# Altium PCB PCB1.PcbDoc
Units mm, origin at the board's own origin, x right, y up, seen from the top; angles counter-clockwise.
Board outline 31 x 28.5 mm, 4 copper layers (L1 (Signal), L2 (GND), L3 (GND), L4 (Signal)), stack 1.57 mm thick; 35 components, 27 nets, 170 pads, 96 vias.
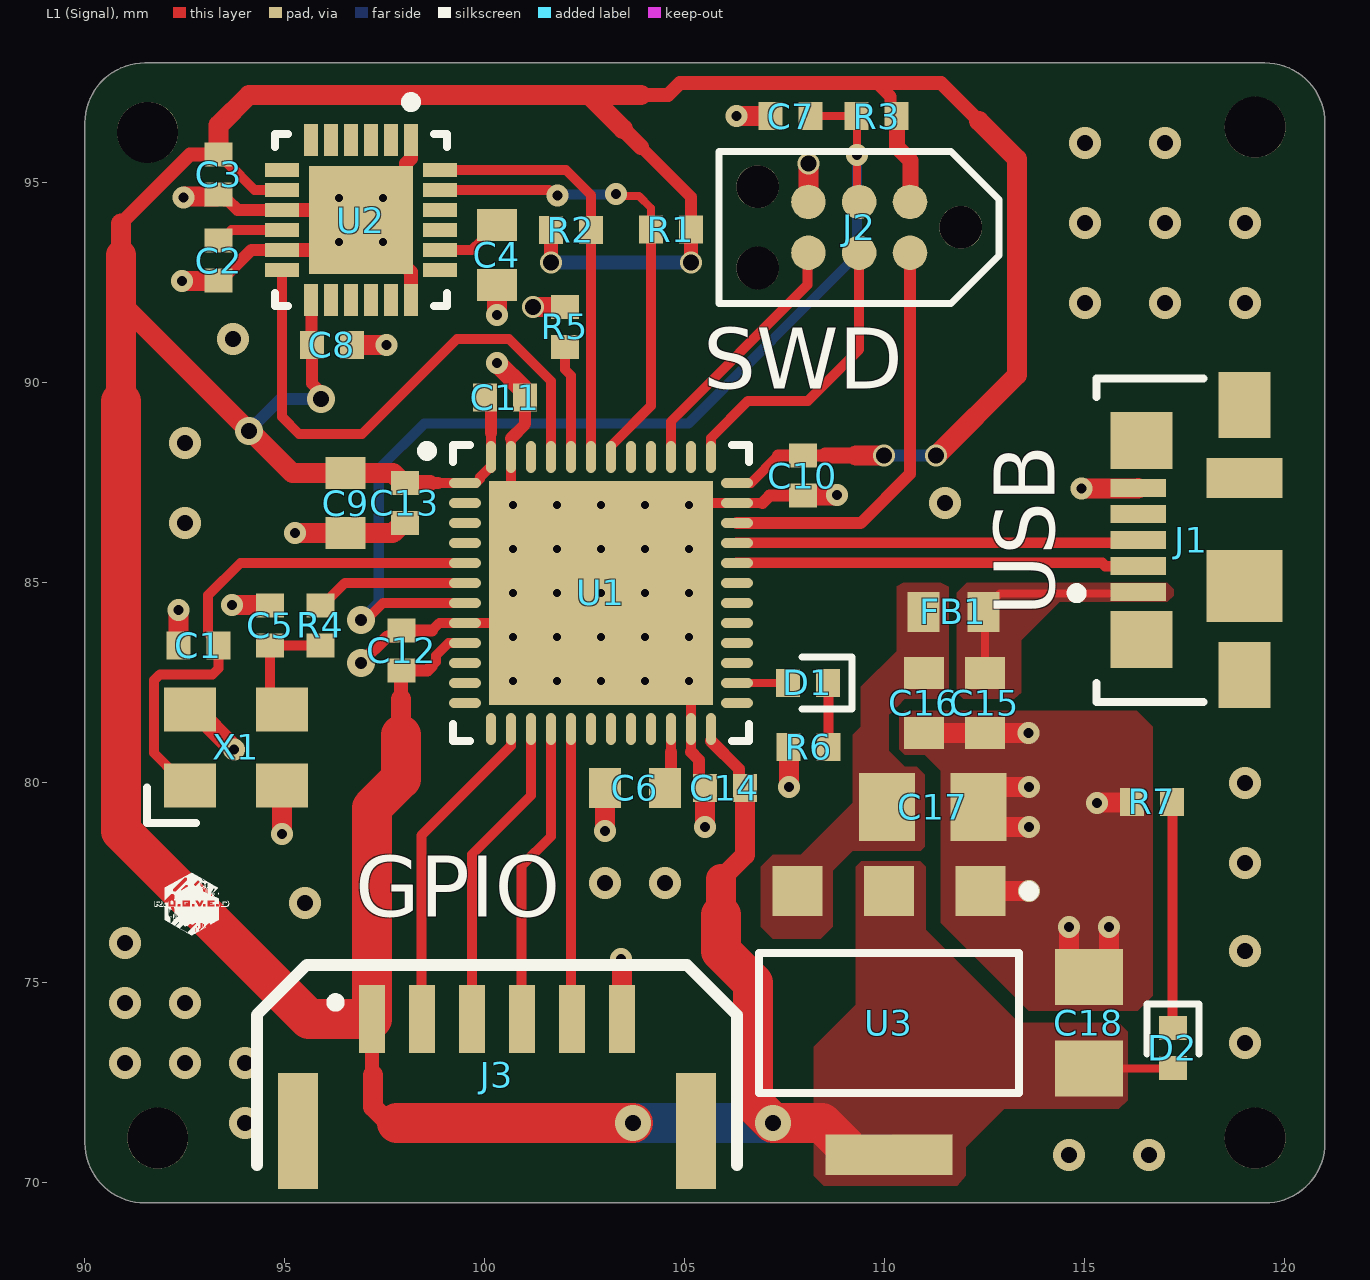
[diagram p0: L1 (Signal) view]
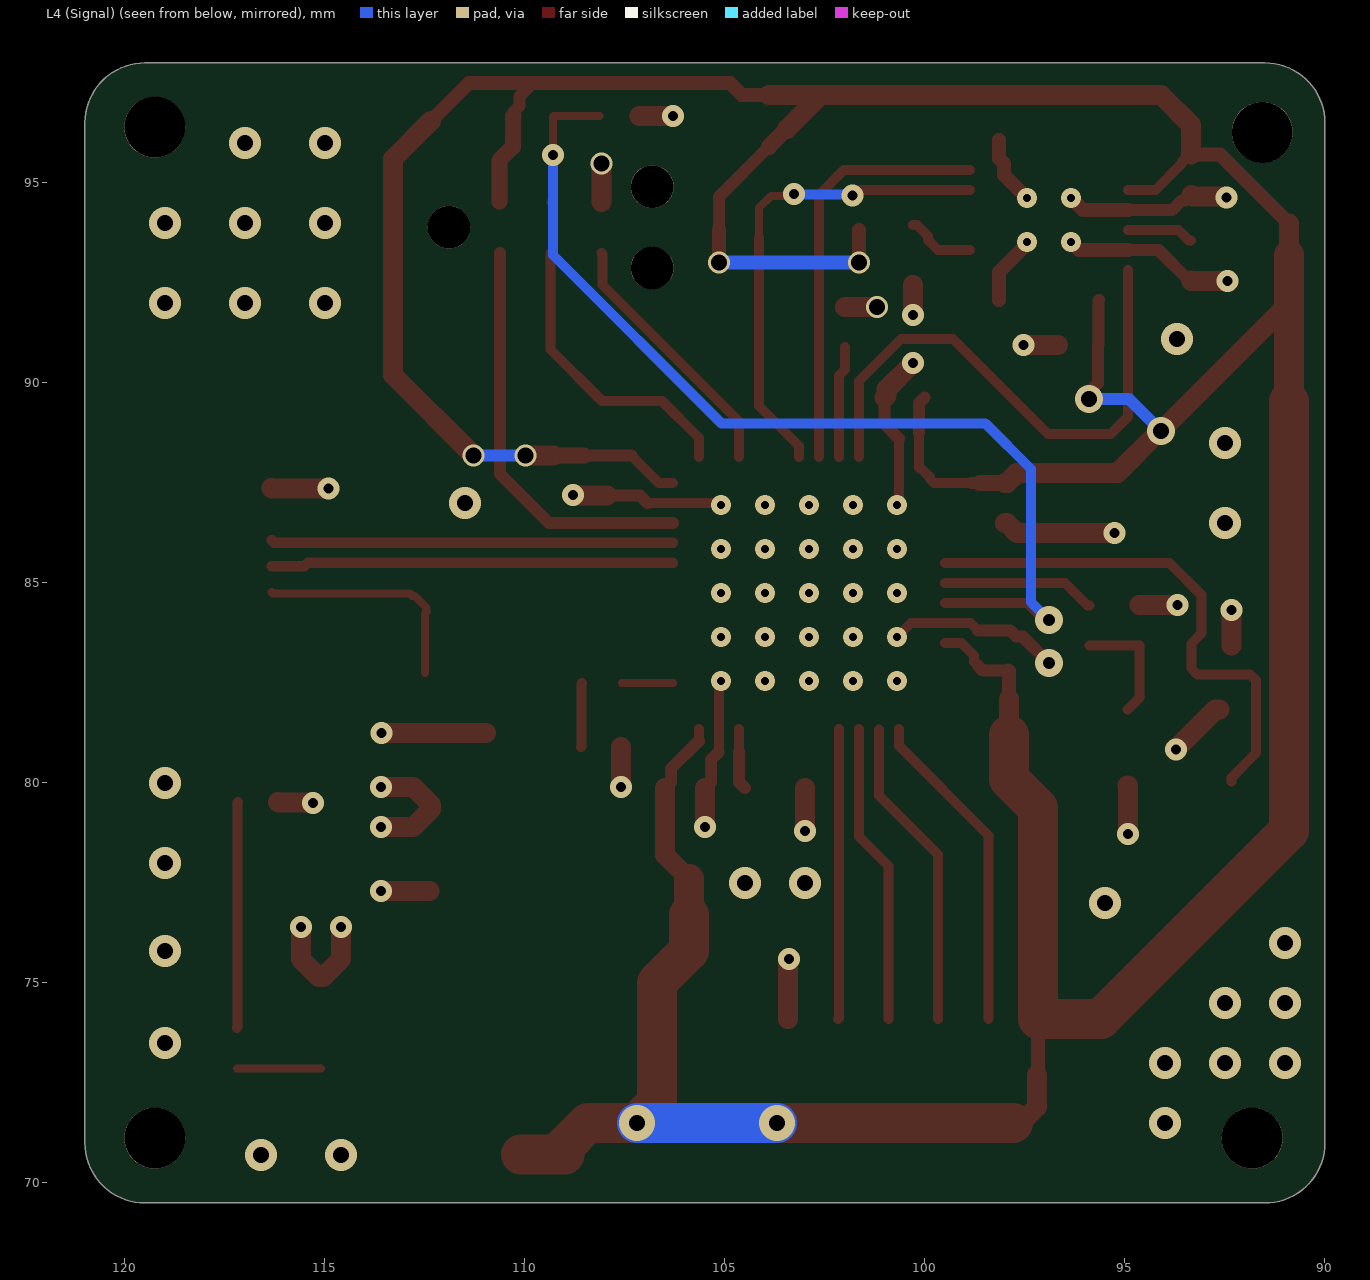
[diagram p1: L4 (Signal) view, seen from below]
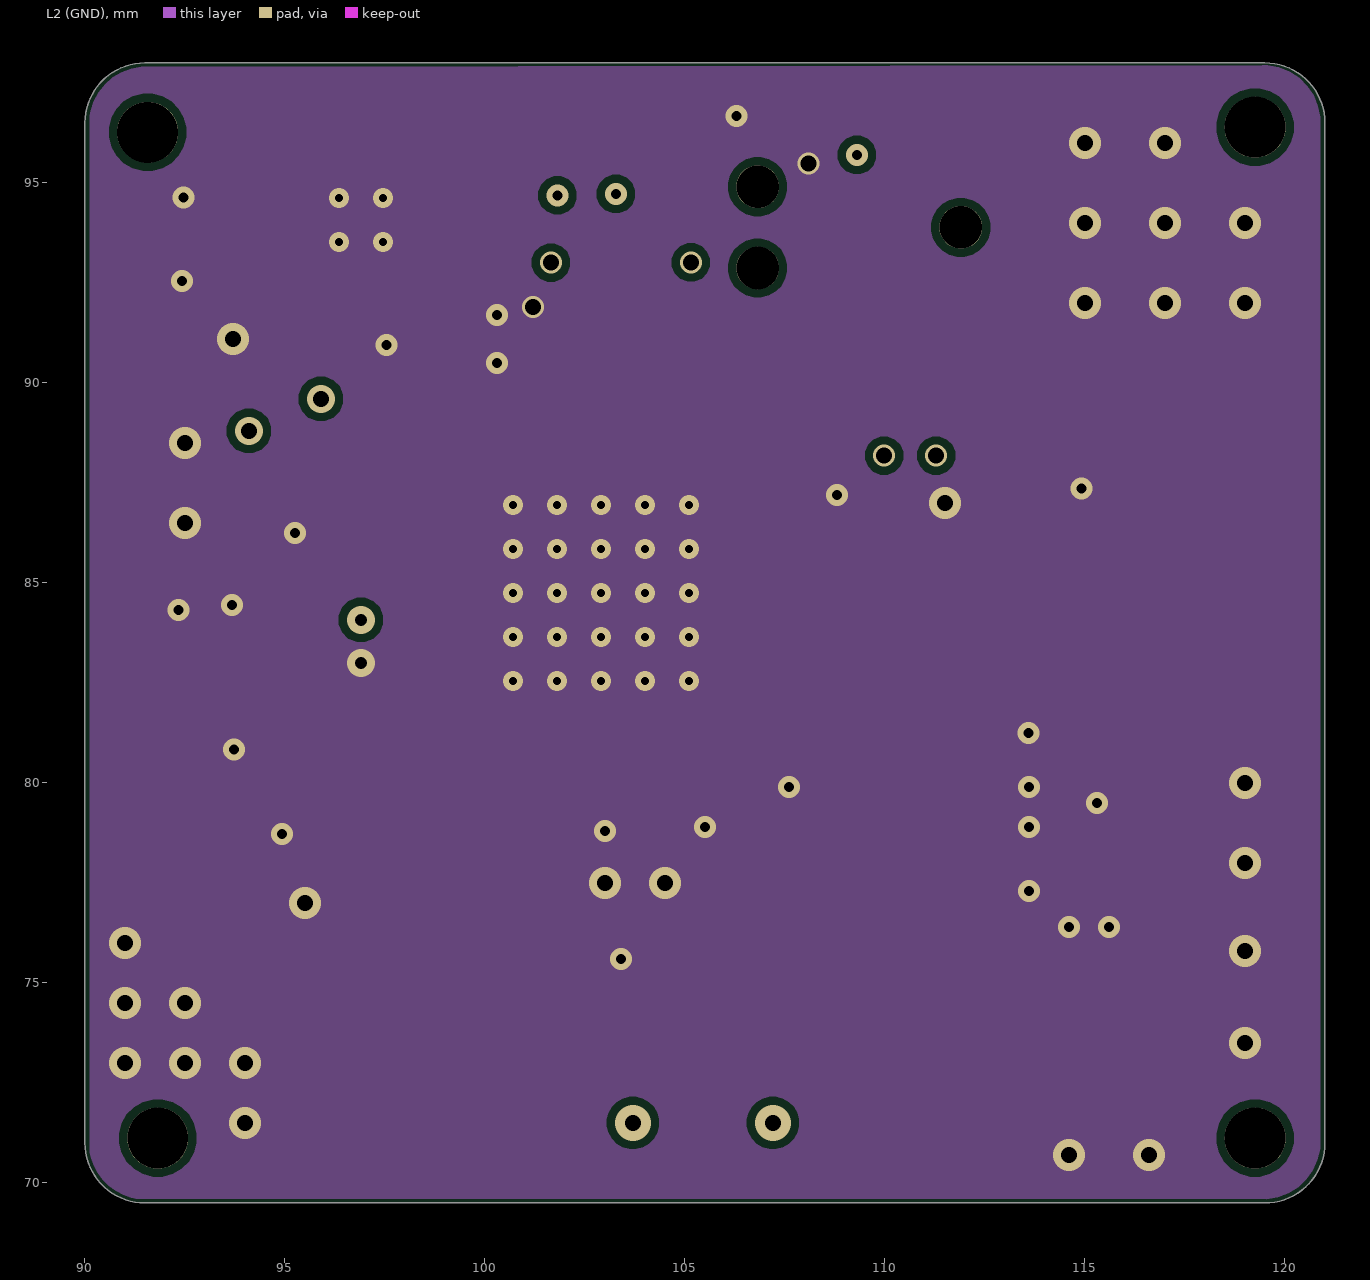
[diagram p2: L2 (GND)]
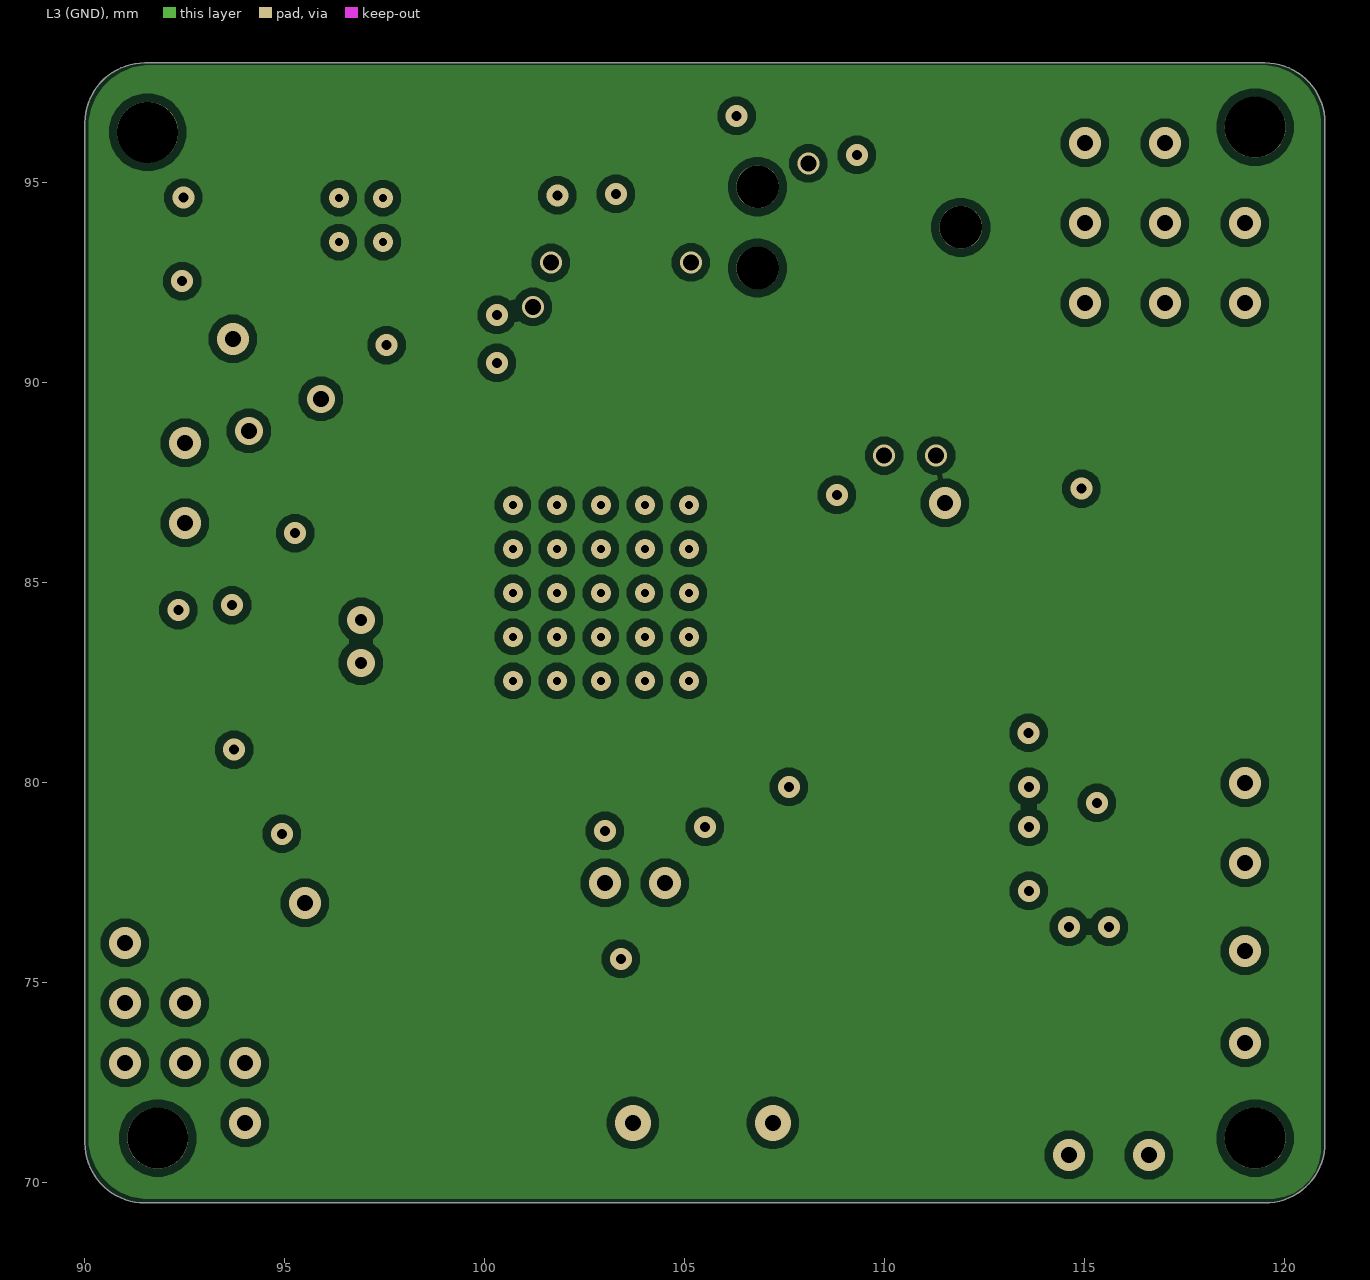
[diagram p3: L3 (GND)]
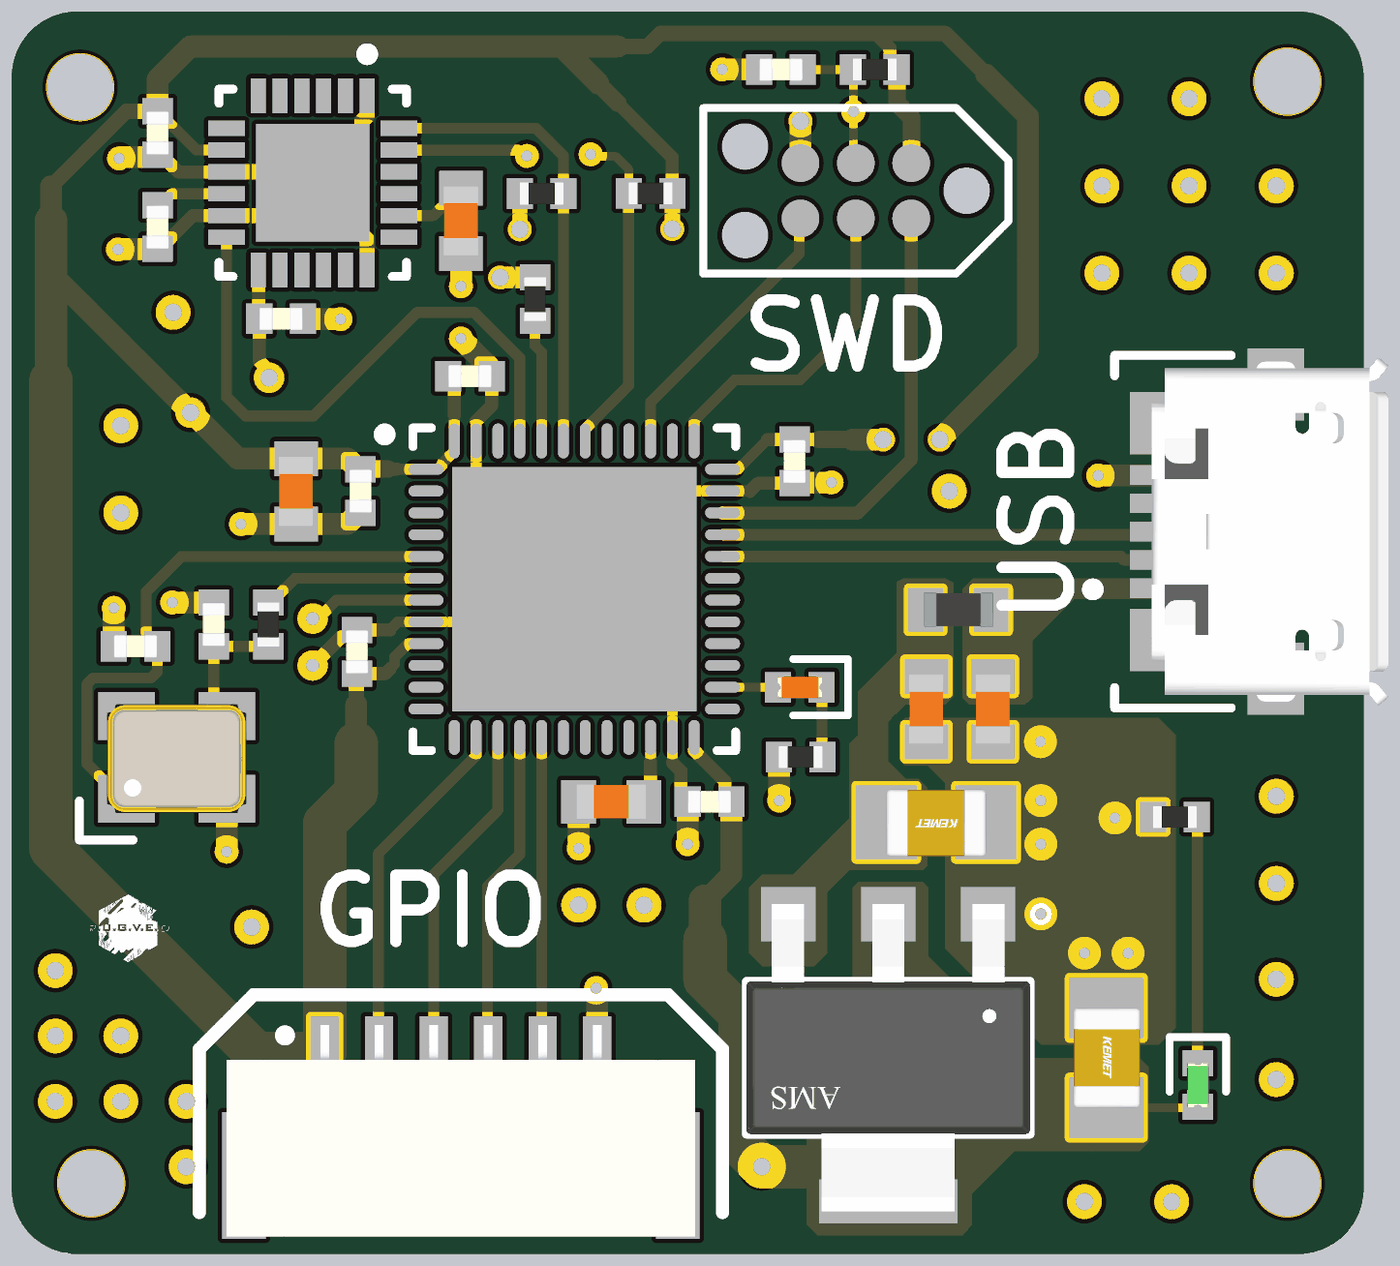
[diagram p4: 3D render of the assembled board from above, using the file's embedded part models]

## Layer stack, top to bottom
Top Solder: solder mask 0.0254, SM-001, Dk 4
L1 (Signal): signal copper 0.035
Dielectric 1: prepreg 0.2, PP-017, Dk 4.6
L2 (GND): signal copper 0.0175
Dielectric 3: core 1.065, Core-039, Dk 4.6
L3 (GND): signal copper 0.0175
Dielectric 5: prepreg 0.2, PP-017, Dk 4.6
L4 (Signal): signal copper 0.035
Bottom Solder: solder mask 0.0254, SM-001, Dk 4

## Board outline
90,71 90,96.5 cw(c91.5,96.5) 91.5,98 119.5,98 cw(c119.5,96.5) 121,96.5 121,71 cw(c119.5,71) 119.5,69.5 91.5,69.5 cw(c91.5,71)

## Design rules (kind name [scope] priority, off if disabled: settings)
Clearance [All] p1: gap=0.2 ignorepadtopadclearanceinfootprint=FALSE except(0: Arc-Fill Arc-Poly Arc-Region Track-Fill Track-Poly Track-Region SMDPad-Fill SMDPad-Poly SMDPad-Region; 0.1: Arc-SMDPad Track-SMDPad SMDPad-SMDPad SMDPad-Via)
DiffPairsRouting [All] p1: maxlimit=0.254 minlimit=0.2 mostfreqgap=0.254 toplayer_maxgap=0.2 toplayer_prefgap=0.2 toplayer_minwidth=0.26 toplayer_maxwidth=0.26 toplayer_prefwidth=0.26 bottomlayer_maxgap=0.2 bottomlayer_prefgap=0.2 bottomlayer_minwidth=0.26 bottomlayer_maxwidth=0.26 bottomlayer_prefwidth=0.26 impedanceprofiledriven=TRUE impedanceprofileid={8F9497E6-6628-411C-8D38-5AE8A2ED5B7B} impedanceprofilevalue=90.000000 maxuncoupledlength=12.7
PolygonConnect [All] p1: connectstyle=Direct reliefconductorwidth=0.254 reliefentries=4 polygonreliefangle="90 Angle" airgapwidth=0.254
RoutingVias [All] p1: holewidth=0.3 width=0.7 viastyle="Through Hole" minholewidth=0.25 minwidth=0.55 maxholewidth=0.4 maxwidth=0.9
SolderMaskExpansion [All] p1: expansion=0.102 istentingtop=FALSE
UnRoutedNet [All] p1: checkbadconnections=TRUE
Width [All] p1: maxlimit=1 minlimit=0.2 preferedwidth=0.3 midlayer1_minwidth=0.254 midlayer1_maxwidth=0.254 midlayer1_prefwidth=0.254 midlayer2_minwidth=0.254 midlayer2_maxwidth=0.254 midlayer2_prefwidth=0.254 bottomlayer_minwidth=0.254 minimp=50.000000 maximp=50.000000 favimp=50.000000
28 further rules are at their usual default settings.

## Classes and differential pairs
differential pair class DIFF_USB: USB_D
differential pair USB_D: +USB_D_P -USB_D_N

## Components (designator, comment, footprint, x,y, rotation, side; value= is the part's Value field where it differs from the comment)
C1 "10p" CAP_0402 92.837,83.439 r180 top
C2 "100n" CAP_0402 93.345,93.056 r90 top
C3 "10n" CAP_0402 93.345,95.215 r90 top
C4 "2u2" CAP_0603 100.3,93.2 r90 top
C5 "10p" CAP_0402 94.631,83.939 r90 top
C6 "2u2" CAP_0603 103.75,79.873 r0 top
C7 "100n" CAP_0402 107.64,96.668 r0 top
C8 "100n" CAP_0402 96.175,90.95 r0 top
C9 "2u2" CAP_0603 96.52,86.995 r90 top
C10 "100n" CAP_0402 107.95,87.681 r90 top
C11 "100n" CAP_0402 100.508,89.637 r180 top
C12 "100n" CAP_0402 97.917,83.312 r270 top
C13 "100n" CAP_0402 98,87 r90 top
C14 "100n" CAP_0402 106,79.873 r0 top
C15 "2u2" CAP_0603 112.5,82 r90 top
C16 "2u2" CAP_0603 110.975,82 r90 top
C17 "22u" CAP_0805 111.2,79.4 r180 top
C18 "22u" CAP_0805 115.1,74 r270 top
D1 "RED" LED_0402_RED 108.075,82.5 r0 top
D2 "GREEN" LED_0402_GREEN 117.2,73.375 r90 top
FB1 "120R" FB_0603 111.709,84.277 r180 top
J1 "473460001" FP-473460001-MFG 118.642,86.07 r90 top
J2 "TC2030-NL" TC2030-NL-FP 109.357,93.889 r180 top
J3 "SM06B-GHS-TB" SM06B-GHS-TB 100.3,72.7 r0 top
R1 "2k2" RES_0402 104.648,93.83 r0 top
R2 "2k2" RES_0402 102.15,93.825 r180 top
R3 "10k" RES_0402 109.79,96.668 r0 top
R4 "0R" RES_0402 95.885,83.939 r90 top
R5 "10k" RES_0402 102,91.4 r270 top
R6 "1k" RES_0402 108.092,80.899 r0 top
R7 "1k" RES_0402 116.675,79.525 r0 top
U1 "STM32F411CEU6" STM-UFQFPN48_L 102.9,84.75 r0 top
U2 "MPU-6050" IS-QFN-24_V 96.901,94.072 r270 top
U3 "AMS1117-3.3" FP-AMS1117-IPC_C 110.1,74 r270 top
X1 "24MHz" XTAL_3225 93.781,80.889 r0 top

## Footprints (in the part's own frame and the unit in brackets; to place one, negate y for a bottom-side part, rotate by r counter-clockwise, add the part's x,y. Pads: shape width x height; smd on the part's side, far side on the other; paste and mask are expansions set on the pad)
CAP_0402 [mm]
  rect 0.6x0.7 smd: 1(-0.5,0) 2(0.5,0)
  body extent -0.5,-0.26 0.5,0.26, height 0.37
CAP_0603 [mm]
  rect 0.8x1 smd: 1(-0.75,0) 2(0.75,0)
  body extent -0.8,-0.4 0.8,0.4, height 0.51
CAP_0805 [mm]
  rect 1.4x1.7 smd: 1(-1.143,0) 2(1.143,0)
  body extent -1.15,-0.76 1.15,0.79, height 1.01
FB_0603 [mm]
  rect 0.8x1 smd: 1(-0.75,0) 2(0.75,0)
  body extent -0.8,-0.4 0.8,0.4, height 0.81
FP-473460001-MFG [mm]
  rect 0.45x1.38 smd paste+0 mask+0: 1(-1.3,2.31) 2(-0.65,2.31) 3(0,2.31) 4(0.65,2.31) 5(1.3,2.31)
  rect 1.425x1.55 smd paste+0 mask+0: 6(-2.488,2.225) 7(2.488,2.225)
  rect 1.65x1.3 smd paste+0 mask+0: 8(-3.375,-0.35) 11(3.375,-0.35)
  rect 1.8x1.9 smd paste+0 mask+0: 9(-1.15,-0.35)
  rect 1x1.9 smd paste+0 mask+0: 10(1.55,-0.35)
  silkscreen extent -4.05,0.67 4.05,3.97, body extent -4.3,-2.48 4.3,3.45, height 0.25
FP-AMS1117-IPC_C [mm]
  rect 1.25x1.25 smd paste+0 mask+0: 1(-3.295,2.29) 2(-3.295,0) 3(-3.295,-2.29)
  rect 1.004x3.182 smd paste+0 mask+0: 4(3.295,0)
  silkscreen extent -3.42,-3.25 1.75,3.63, body extent -3.9,-3.35 3.9,3.35, height 0.25
IS-QFN-24_V [mm] "QFN, 24-Leads, Body 4x4mm, Pitch 0.5mm, Thermal Pad 2.7x2.6mm"
  rect 0.8x0.35 smd: 1(-2,1.25) 2(-2,0.75) 3(-2,0.25) 4(-2,-0.25) 5(-2,-0.75) 6(-2,-1.25) 13(2,-1.25) 14(2,-0.75) 15(2,-0.25) 16(2,0.25) 17(2,0.75) 18(2,1.25)
  rect 0.35x0.85 smd mask+0.102: 7(-1.25,-1.975) 8(-0.75,-1.975) 9(-0.25,-1.975) 10(0.25,-1.975) 11(0.75,-1.975) 19(1.25,1.975) 20(0.75,1.975) 21(0.25,1.975) 22(-0.25,1.975) 23(-0.75,1.975) 24(-1.25,1.975)
  rect 0.35x0.85 smd paste+0: 12(1.25,-1.975)
  rect 2.7x2.6 smd: 25(0,0)
  silkscreen extent -3.07,-2.15 2.15,2.15, body extent -2,-2 2,2, height 0.95
LED_0402_GREEN [mm]
  rect 0.6x0.7 smd: A(-0.5,0) K(0.5,0)
  silkscreen extent -0.15,-0.65 1.1,0.65, body extent -0.51,-0.25 0.51,0.25, height 0.45
LED_0402_RED [mm]
  rect 0.6x0.7 smd: A(-0.5,0) K(0.5,0)
  silkscreen extent -0.15,-0.65 1.1,0.65, body extent -0.51,-0.25 0.51,0.25, height 0.45
RES_0402 [mm]
  rect 0.6x0.7 smd: 1(-0.5,0) 2(0.5,0)
  body extent -0.5,-0.25 0.5,0.25, height 0.3
SM06B-GHS-TB [mm]
  rect 0.65x1.7 smd: 1(-3.125,1.4) 2(-1.875,1.4) 3(-0.625,1.4) 4(0.625,1.4) 5(1.875,1.4) 6(3.125,1.4)
  rect 1x2.9 smd: ""(-4.975,-1.4) ""(4.975,-1.4)
  silkscreen extent -6,-2.25 6,2.75, body extent -5.38,-2.8 5.38,2.05, height 4.26
STM-UFQFPN48_L [mm] "QFN, 48-Leads, Body 7.1x7.1mm, Pitch 0.5mm, Thermal Pad 5.6x5.6mm, IPC High Density"
  oval 0.8x0.25 smd: 1(-3.4,2.75) 2(-3.4,2.25) 3(-3.4,1.75) 4(-3.4,1.25) 5(-3.4,0.75) 6(-3.4,0.25) 7(-3.4,-0.25) 8(-3.4,-0.75) 9(-3.4,-1.25) 10(-3.4,-1.75) 11(-3.4,-2.25) 12(-3.4,-2.75) 25(3.4,-2.75) 26(3.4,-2.25) 27(3.4,-1.75) 28(3.4,-1.25) 29(3.4,-0.75) 30(3.4,-0.25) 31(3.4,0.25) 32(3.4,0.75) 33(3.4,1.25) 34(3.4,1.75) 35(3.4,2.25) 36(3.4,2.75)
  oval 0.25x0.8 smd: 13(-2.75,-3.4) 14(-2.25,-3.4) 15(-1.75,-3.4) 16(-1.25,-3.4) 17(-0.75,-3.4) 18(-0.25,-3.4) 19(0.25,-3.4) 20(0.75,-3.4) 21(1.25,-3.4) 22(1.75,-3.4) 23(2.25,-3.4) 24(2.75,-3.4) 37(2.75,3.4) 38(2.25,3.4) 39(1.75,3.4) 40(1.25,3.4) 41(0.75,3.4) 42(0.25,3.4) 43(-0.25,3.4) 44(-0.75,3.4) 45(-1.25,3.4) 46(-1.75,3.4) 47(-2.25,3.4) 48(-2.75,3.4)
  rect 5.6x5.6 smd: 49(0,0)
  silkscreen extent -4.47,-3.7 3.7,3.7, body extent -3.55,-3.55 3.55,3.55, height 0.6
TC2030-NL-FP [mil]
  round 33.98 smd: 1(-50,-25) 2(-50,25) 3(0,-25) 4(0,25) 5(50,-25) 6(50,25)
  round 42.01 hole 42.01 unplated: MH(-100,0) MH(100,-40) MH(100,40)
  silkscreen extent -138,-75 138,75
XTAL_3225 [mm]
  rect 1.3x1.1 smd: 1(-1.15,-0.95) 2(1.15,-0.95) 3(1.15,0.95) (-1.15,0.95)
  silkscreen extent -2.23,-1.89 -1,-1, body extent -1.6,-1.28 1.6,1.22, height 0.61

## Part data
C1 C2 C3 C5 C7 C8 C10 C11 C12 C13 C14: library part CAP_0402_16V, "Capacitor SMD 0402 16V"
C4 C6 C9 C15 C16: library part CAP_0603_16V, "Capacitor SMD 0603 16V"
C17 C18: library part CAP_0805_16V, "Capacitor SMD 0805 16V"
D1: library part LED_0402_RED, "LED 0402 RED SMD"
D2: library part LED_0402_GREEN, "LED 0402 GREEN SMD"
FB1: library part FB_0603, "Ferrite Bead SMD 0603"
J1: library part CMP-2000-05246-2, "CONN RCPT USB2.0 MICRO B SMD R/A", Current Rating=1.8A, Manufacturer=Molex, Package=0, Temperature="-30°C to +85°C", Temperature Range High=+85°C, Temperature Range Low=-30°C, Voltage Rating=30V, Automotive=No, Category=Conn, ComponentLink2Description=Datasheet, ComponentLink2URL=https://www.molex.com/webdocs/datasheets/pdf/en-us/0473460001_IO_CONNECTORS.pdf, Conn Orientation="Right Angle", Contact Material=Gold,Nickel, Device Class L1=Connectors, Device Class L2="USB Connectors", Device Class L3=unset, Digikey Description="CONN RCPT USB2.0 MICRO B SMD R/A", Footprint Url=https://www.molex.com/pdm_docs/sd/473460001_sd.pdf, Height=2.945mm, Is Female=yes, Lead Free=Yes, Manufacturer Part Number=473460001, Number Of Contacts=5, Octopart=https://octopart.com/47346-0001-molex-7164928, Pitch=0.65mm, RoHS=TRUE, Shielding=true, Usb Standard="USB 2.0"
J2: "Tag-Connect No-Solder SWD Debug Connector (No Legs) DO NOT PLACE", Manufacturer=Tag-Connect, Manufacturer Part Number=TC2030-NL-FP
J3: "Header Connector 6 Position 1.25MM Pitch SMD Horizontal JST GH", Manufacturer=JST, Manufacturer Part Number=SM06B-GHS-TB
R1 R2 R3 R4 R5 R6 R7: library part RES_0402, "Resistor SMD 0402"
U1: library part CMP-0243-00165-1, "ARM Cortex-M4 32-bit MCU+FPU, 512 KB Flash, 128 KB RAM, 36 I/Os, 48-Pin UFQFPN, -40 to 85 degC, Tray", I/Os (High Current)=36, Operating Frequency(F) (Processor speed) (MHz)=100, Package Description=UFQFPN48, Package Reference="48-Pin Ultra Thin Fine Pitch Quad Flat No-Lead, 7 x 7 x 0.6 mm Body, 0.5 mm Pitch, Exposed Pad", Supply Voltage(Vcc) min (V)=1.7, ComponentLink1Description="Manufacturer URL", ComponentLink1URL=http://www.st.com/, ComponentLink2Description=Datasheet, ComponentLink2URL=http://www.st.com/st-web-ui/static/active/en/resource/technical/document/datasheet/DM00115249.pdf, Core="ARM Cortex-M4", DatasheetVersion="Rev. 6", FLASH Size (Prog) (kB)=512, Internal RAM Size (kB)=128, Mounting Technology="Surface Mount", Packing=Tray
U2: library part CMP-1753-00002-2, "3-Axis Gyroscope, Accelerometer and a Digital Motion Processor(TM) (DMP), 2.375 to 3.46 V, -40 to 85 degC, 24-Pin QFN, RoHS, Tape and Reel", Manufacturer=InvenSense, Standard Package=5,000, Category=Sensors,Transducers, Datasheet URL=http://datasheet.octopart.com/MPU-6050-InvenSense-datasheet-14421344.pdf, Datasheet Version="Rev. 3.3, 05/2012", Dynamic Catalog=MPU-6000™Series, Family=Multifunction, Featured Product=MPU-60506-Axis,IntegratedI²CSolution, Manufacturer URL=http://www.invensense.com/, Online Catalog=MPU-6000™Series, Other Names="1428-1007-2 / MPU6050", Output Type=Digital, Sensor Type=MotionTracking, Unit PriceUSD=Digital
U3: library part CMP-209535-000001-1, "LDO Voltage Regulators 1A, 3.3V", Dropout Voltage=1.1V, Manufacturer="Advanced Monolithic Systems", Max Junction Temp=+125°C, Max Power Dissipation=1.2W, Max Supply Voltage=15V, Nominal Supply Current=5mA, Output Current=1A, Output Voltage=3.3V, Package=AMS1117, Temperature="-40°C to +125°C", Temperature Range Low=-40°C, Automotive=No, Category=IC, ComponentLink2Description=Datasheet, ComponentLink2URL=http://www.advanced-monolithic.com/pdf/ds1117.pdf, Device Class L1="Integrated Circuits (ICs)", Device Class L2="Power Management ICs", Device Class L3="Voltage Regulators - Linear", Height=1.8mm, Ipc Land Pattern Name=SOT229P700X180-4, Lead Free=Yes, Manufacturer Part Number=AMS1117-3.3, Number Of Outputs=1, Octopart=https://octopart.com/ams1117-3.3-advanced+monolithic+systems-25899300, Output Type=Fixed, RoHS=TRUE, Standoff Height=0.64mm, Temperature Range High=+125°C
X1: library part TSX-3225_24.0000MF15X-AC, "Crystal SMD 24MHz 10PPM 7pF 3225", Load Capacitance=7pF, Manufacturer=Epson, Manufacturer Number="TSX-3225 24.0000MF15X-AC", ESR=40R, Type=XTAL

## Free pads (board coordinates)
  round 1.524 hole 1.524: 1(91.567,96.266) 1(91.821,71.12) 1(119.253,71.12) 1(119.253,96.393)

## Via types
v1: diameter 0.5, hole 0.2, L1 (Signal) to L4 (Signal), 29 vias
v2: diameter 0.8, hole 0.4, L1 (Signal) to L4 (Signal), 28 vias
v3: diameter 0.55, hole 0.25, L1 (Signal) to L4 (Signal), 27 vias
v4: diameter 0.55, hole 0.4, L1 (Signal) to L4 (Signal), 6 vias
v5: diameter 0.7, hole 0.3, L1 (Signal) to L4 (Signal), 2 vias
v6: diameter 0.9, hole 0.4, L1 (Signal) to L4 (Signal), 2 vias
v7: diameter 0.7, hole 0.4, L1 (Signal) to L4 (Signal), 2 vias

## Nets (pads, with @x,y where several pads share a name; then routed paths per layer and width w, separated by ;. In a path a pad name is that pad's centre, name@x,y a point inside that pad or via, vN(x,y) a via of type N, cw(c..) or ccw(c..) an arc to the next point about the centre after c; other vN are vias at no path point)
+3V3: C3.2 C8.1 C9.2 C10.2 C11.2 C12.2 C13.2 C14.2 C18.2 D2.A J2.1 J3.1 R1.2 R2.2 R3.2 U1.1 U1.9 U1.24 U1.36 U1.48 U2.8 U2.13 U3.2 U3.4 | length 134.3
  L1 (Signal) w0.2: C18.2 D2.A@117.2,72.857
  L1 (Signal) w0.25: C3.2 93.395,95.715 93.57,95.54 93.57,95.49 94.238,94.822 U2.8@94.918,94.822 ; 98.679,82.931 98.775,83.027 98.775,83.186 99.089,83.5 U1.9 ; 98.831,87.503 98.834,87.5 U1.1 99.775,87.5 99.875,87.6 99.875,87.643 100.107,87.875 100.15,87.875 U1.48 100.15,88.748 ; U1.24@105.65,81.05 U1.24 ; U1.36 106.652,87.5 107.332,88.181
  L1 (Signal) w0.3: U2.13 95.663,92.06 95.663,90.962 C8.1 95.675,89.987 95.9,89.762 v7(95.9,89.6) ; C12.2 98.56,82.812 98.679,82.931 ; 98.628,87.503 98.831,87.503 ; C11.2 100.15,89.494 100.15,88.748 ; 103.9,95.9 105.148,94.652 R1.2 ; U1.24@105.65,81.05 106.35,80.35 106.35,80.023 C14.2 ; 107.332,88.181 108.519,88.181 ; 109.801,97.499 110.14,97.16 110.14,96.918 R3.2@110.29,96.768
  L1 (Signal) w0.35: 90.9,93.991 92.624,95.715 C3.2 ; J3.1 97.175,72.725 97.2,72.7 ; 97.9,82.1 97.9,82.795 C12.2 ; v4(101.65,93.005) R2.2 ; 103.9,97.2 104.574,97.2 104.873,97.499 109.801,97.499 111.401,97.499 112.351,96.549 ; v4(105.148,93.012) R1.2
  L1 (Signal) w0.4: C13.2@98.003,87.503 98.628,87.503 ; 103.45,96.35 103.9,95.9 ; 108.519,88.181 109.281,88.181 ; R3.2@110.291,96.667 110.3,96.658 110.3,95.9 110.637,95.563 J2.1@110.637,94.534
  L1 (Signal) w0.5: 90.9,91.9 91,91.9 v7(94.1,88.8) ; 90.9,93.2 90.9,93.991 ; C3.2 93.345,96.445 94.1,97.2 102.6,97.2 ; v7@94.133,88.8 95.188,87.745 C9.2 97.705,87.745 97.947,87.503 C13.2@98.003,87.503 ; 97.2,72.7 97.2,71.9 97.6,71.5 97.8,71.5 ; 97.9,81.2 97.9,82.1 ; 103.45,96.35 102.6,97.2 ; 103.9,97.2 102.6,97.2 ; 105.9,77.6 106.5,78.2 C14.2 ; 109.281,88.181 v4(109.981,88.181) ; v4(111.281,88.181) 113.3,90.2 113.3,95.6 112.351,96.549
  L1 (Signal) w0.75: 90.9,89.531 90.9,91.9 90.9,93.2 ; 105.9,76.7 105.9,77.6
  L1 (Signal) w1: 90.9,89.531 90.9,78.8 95.6,74.1 J3.1 97.175,79.375 97.9,80.1 97.9,81.2 ; 97.8,71.5 v6(103.7,71.5) ; 105.9,76.7 105.9,75.8 106.7,75 106.7,72 v6(107.2,71.5) 108.423,71.5 109.009,70.914 109.009,70.707 109.011,70.705 U3.4
  L4 (Signal) w0.254: v4(101.65,93.005) v4@101.653,93.009 ; v4@105.145,93.009 v4(105.148,93.012)
  L4 (Signal) w0.3: v7(94.1,88.8) 94.9,89.6 v7(95.9,89.6) ; v4(109.981,88.181) v4(111.281,88.181)
  L4 (Signal) w0.35: v4@101.653,93.009 v4@105.145,93.009
  L4 (Signal) w1: v6(103.7,71.5) v6(107.2,71.5)
+5: C16.2 C17.2 FB1.2 U3.3
GND: C1.2 C2.1 C3.1 C4.1 C5.2 C6.1 C7.1 C8.2 C9.1 C10.1 C11.1 C12.1 C13.1 C14.1 C15.1 C16.1 C17.1 C18.1 J1.5 J2.5 J3.6 R5.1 R6.1 R7.1 U1.8 U1.23 U1.35 U1.47 U1.49 U2.1 U2.9 U2.11 U2.18 U2.25 U3.1 X1.2 X1. | length 55.4
  L1 (Signal) w0.25: 98.671,83.812 98.859,84 U1.8 100.35,84 v1(100.7,83.65) ; 100.65,88.612 U1.47 100.65,87 v1(100.7,86.95) ; v1(105.1,82.55) 105.15,82.5 U1.23 105.15,80.778 105.156,80.772 ; v1(105.1,86.95) 105.15,87 U1.35 106.929,87 106.934,86.995
  L1 (Signal) w0.3: C2.1 93.395,92.556 94.161,93.322 U2.11 ; C3.1 93.495,94.565 93.575,94.565 93.818,94.322 U2.9 ; v5(96.9,83) 97.562,83.662 97.717,83.662 97.867,83.812 C12.1 98.671,83.812 ; 100.65,88.612 101.008,88.97 C11.1 ; 105.156,80.772 105.35,80.578 105.35,80.023 C14.1 ; 106.934,86.995 107.12,87.181 C10.1
  L1 (Signal) w0.35: U2.11 96.151,93.322 v1(96.351,93.522) ; U2.9 96.051,94.322 v1(96.351,94.622) ; v1(97.451,93.522) 97.451,93.472 98.151,92.772 U2.18 ; U2.25@97.451,94.672 v1(97.451,94.622) 98.026,95.197 98.026,95.483 98.151,95.608 U2.1
  L1 (Signal) w0.5: C1.2 92.338,83.44 92.338,84.318 v3(92.339,84.32) ; v3(92.433,92.542) 92.44,92.549 93.338,92.549 C2.1 ; v3(92.46,94.632) 92.474,94.632 92.507,94.665 93.295,94.665 C3.1@93.33,94.7 ; X1. 92.731,81.839 93.727,80.843 v3(93.727,80.832) ; v3@93.68,84.442 C5.2@94.631,84.442 ; v3(94.927,78.729) 94.929,78.731 94.929,79.937 X1.2 ; v3(95.255,86.245) C9.1 97.695,86.245 97.95,86.5 C13.1 ; C8.2 96.678,90.947 97.538,90.947 v3(97.54,90.944) ; v3(100.3,90.5) 100.958,89.842 100.958,89.687 C11.1 ; v3(100.3,91.7) C4.1 ; v4(101.2,91.9) R5.1 ; v3(103,78.8) C6.1 ; v3(103.4,75.6) 103.4,75.586 103.425,75.561 J3.6 ; v3(105.5,78.9) C14.1 ; v3@106.295,96.671 C7.1@107.14,96.671 ; R6.1 107.596,80.895 107.596,79.904 v3(107.6,79.9) ; C10.1 107.96,87.19 108.79,87.19 v3(108.8,87.2) ; J2.5 v4(108.087,95.487) ; C16.1 C15.1 ; U3.1 112.393,77.298 113.597,77.298 v3(113.6,77.3) ; C15.1@112.5,81.25 v3@113.59,81.25 ; v3(113.6,78.9) 112.793,78.9 112.343,79.35 C17.1 112.343,79.45 112.793,79.9 v3(113.6,79.9) ; v3(114.6,76.4) 114.6,75.593 115.05,75.143 115.15,75.143 115.6,75.593 v3(115.6,76.4) ; v3(114.913,87.356) 114.92,87.363 116.325,87.363 J1.5 ; v3(115.3,79.5) 115.31,79.51 116.16,79.51 R7.1
  other v1: 100.7,82.55 101.8,82.55 102.9,82.55 104,82.55 101.8,83.65 102.9,83.65 104,83.65 105.1,83.65 100.7,84.75 101.8,84.75 102.9,84.75 104,84.75 105.1,84.75 100.7,85.85 101.8,85.85 102.9,85.85 104,85.85 105.1,85.85 101.8,86.95 102.9,86.95 104,86.95
  other v2: 114.6,70.7 116.6,70.696 94,71.5 91,73 92.5,73 94,73 119,73.5 91,74.5 92.5,74.5 119,75.8 91,76 95.5,77 103,77.5 104.5,77.5 119,78 119,80 92.5,86.5 111.5,87 92.5,88.5 93.7,91.1 115,92 117,92 119,92 115,94 117,94 119,94 115,96 117,96
  other v3: 113.591,81.251 93.68,84.445 106.292,96.674
IMU_CPOUT: C4.2 U2.20 | length 1.7
  L1 (Signal) w0.25: U2.20 99.672,93.322 99.925,93.575 99.925,93.675 100.2,93.95 C4.2
IMU_INT: U1.45 U2.12 | length 13.9
  L1 (Signal) w0.25: U2.12 94.926,89.153 95.354,88.725 96.925,88.725 99.3,91.1 100.6,91.1 101.65,90.05 U1.45
IMU_REGOUT: C2.2 U2.10 | length 1.7
  L1 (Signal) w0.25: C2.2 93.395,93.556 93.661,93.822 U2.10
IMU_SCL: R1.1 U1.42 U2.23 | length 12.1
  L1 (Signal) w0.2: v3(103.275,94.725) 103.325,94.675 103.85,94.675 104.148,94.377 R1.1@104.148,93.63
  L1 (Signal) w0.25: U1.42 103.15,88.425 104.148,89.423 R1.1@104.148,93.63
  L1 (Signal) w0.254: U2.23 101.599,94.822 101.733,94.688 v3(101.813,94.688)
  L2 (GND) w0.254: v3(101.813,94.688) v3@101.832,94.707 ; v3@103.257,94.707 v3(103.275,94.725)
  L4 (Signal) w0.254: v3@101.832,94.707 v3@103.257,94.707
IMU_SDA: R2.1 U1.43 U2.24 | length 10.6
  L1 (Signal) w0.25: U2.24 102.028,95.322 102.65,94.7 102.65,93.625 U1.43
LED_PWR_K: D2.K R7.2 | length 5.7
  L1 (Signal) w0.25: R7.2 117.187,79.513 117.187,73.888 D2.K
MCU_BOOT0: R5.2 U1.44 | length 2.8
  L1 (Signal) w0.25: R5.2 102,90.336 102.15,90.186 U1.44
MCU_LED_A: D1.A U1.26 | length 1.3
  L1 (Signal) w0.2: U1.26 D1.A
MCU_LED_K: D1.K R6.2 | length 1.6
  L1 (Signal) w0.25: D1.K 108.583,82.492 108.583,80.907 R6.2
MCU_NRST: C7.2 J2.3 R3.1 U1.7 | length 26.7
  L1 (Signal) w0.2: C7.2 R3.1 ; R3.1@109.3,96.658 109.3,94.581 J2.3
  L1 (Signal) w0.25: v5(96.901,84.074) 97.023,84.074 97.449,84.5 U1.7
  L4 (Signal) w0.254: v5(96.901,84.074) 97.347,84.52 97.347,87.847 98.483,88.983 105.083,88.983 109.3,93.2 v3(109.3,95.7)
MCU_OSC_IN: C1.1 U1.5 X1.1 | length 13.2
  L1 (Signal) w0.25: X1.1@92.331,80.039 92.331,80.139 91.725,80.745 91.725,82.568 91.871,82.714 93.191,82.714 93.337,82.86 C1.1 93.337,83.489 93.08,83.746 93.08,84.693 93.887,85.5 U1.5
MCU_OSC_OUT: R4.2 U1.6 | length 3.8
  L1 (Signal) w0.25: R4.2 95.935,84.439 96.496,85 U1.6
MCU_PA4: J3.2 U1.14 | length 8.2
  L1 (Signal) w0.25: J3.2@98.409,74.1 98.409,78.687 100.65,80.928 U1.14
MCU_PA5: J3.3 U1.15 | length 7.9
  L1 (Signal) w0.25: J3.3 99.675,78.212 101.15,79.687 U1.15@101.15,81.34
MCU_PA6: J3.4 U1.16 | length 7.6
  L1 (Signal) w0.25: J3.4@100.909,74.1 100.909,77.922 101.65,78.663 U1.16
MCU_PA7: J3.5 U1.17 | length 7.3
  L1 (Signal) w0.25: U1.17 102.15,74.125 J3.5
MCU_SWCLK: J2.4 U1.37 | length 7.5
  L1 (Signal) w0.25: U1.37 105.65,88.625 106.577,89.552 108.077,89.552 109.357,90.832 J2.4
MCU_SWDIO: J2.2 U1.34 | length 10.4
  L1 (Signal) w0.3: U1.34 106.305,86.495 109.395,86.495 110.627,87.727 J2.2
MCU_SWO: J2.6 U1.39 | length 6.5
  L1 (Signal) w0.25: U1.39 104.65,89.038 108.06,92.448 108.06,93.227 J2.6
MCU_VCAP1: C6.2 U1.22 | length 1.5
  L1 (Signal) w0.25: 104.648,80.772 104.65,80.774 U1.22
  L1 (Signal) w0.3: C6.2 104.648,80.021 104.648,80.772
USB_D_N: J1.2 U1.32 | length 10.1
  L1 (Signal) w0.26: U1.32 115.432,85.5 115.512,85.42 J1.2
USB_D_P: J1.3 U1.33 | length 10.1
  L1 (Signal) w0.26: U1.33 116.262,86 J1.3
VBUS: C15.2 FB1.1 J1.1 | length 5.7
  L1 (Signal) w0.2: C15.2 112.5,84.236 FB1.1 112.459,84.377 112.759,84.677 112.818,84.677 112.876,84.736 116.297,84.736 J1.1
XTAL_OUT: C5.1 R4.1 X1.3 | length 3
  L1 (Signal) w0.25: X1.3 94.631,82.139 C5.1 R4.1
pads on no net: J1.4 J1.6 J1.7 J1.8 J1.9 J1.10 J1.11 J2.MH J3. U1.2 U1.3 U1.4 U1.10 U1.11 U1.12 U1.13 U1.18 U1.19 U1.20 U1.21 U1.25 U1.27 U1.28 U1.29 U1.30 U1.31 U1.38 U1.40 U1.41 U1.46 U2.2 U2.3 U2.4 U2.5 U2.6 U2.7 U2.14 U2.15 U2.16 U2.17 U2.19 U2.21 U2.22

## Polygon pours and split planes (outlines as drawn)
+3V3 on L1 (Signal) "+3V3_L01_P005" (solid, pour order 5): 112.025,70.887 112.988,71.85 115.85,71.85 116.075,72.063 116.075,73.775 115.85,74 113.35,74 111.025,76.325 111.025,77.9 110.886,78.039 109.414,78.039 109.275,77.9 109.275,74.45 108.225,73.4 108.225,70.175 108.475,69.925 111.814,69.925 112.025,70.175
GND on L1 (Signal) "GND_L01_P009" (solid, pour order 9): 110.5,81.8 110.355,81.69 110.355,80.845 110.5,80.7 111,80.7 111.4,80.3 111.4,76.5 113.6,74.3 116.32,74.3 116.7,74.68 116.7,81.4 116.3,81.8
+5 on L1 (Signal) "+5_L01_P008" (solid, pour order 8): 110.29,84.922 110.29,83.29 109.4,82.4 109.4,81.4 109.2,81.2 109.2,79.5 107.9,78.2 107.2,78.2 106.9,77.9 106.9,76.4 107.2,76.1 108.4,76.1 108.7,76.4 108.7,77.8 109.2,78.3 110.9,78.3 111,78.4 111,80.2 110.8,80.4 110.5,80.4 110.1,80.8 110.1,81.7 110.5,82.1 111.4,82.1 111.6,82.3 111.6,84.9 111.4,85 110.455,85
VBUS on L1 (Signal) "VBUS_L01_P000" (solid, pour order 0): 112.051,85 111.8,84.749 111.8,82.256 111.956,82.1 113.237,82.1 113.411,82.256 113.411,83.566 114.37,84.525 117.057,84.525 117.221,84.675 117.221,84.836 117.057,85
GND on L2 (GND) "GND_L02_P010" (solid, pour order 10): 90.122,70.755 90.122,96.678 cw(c91.528,96.48) 91.537,97.9 119.428,97.941 cw(c119.441,96.5) 120.881,96.5 120.881,71 cw(c119.441,71.04) 119.4,69.6 109.2,69.6 91.268,69.6 cw(c91.589,71.064)
no net on L3 (GND) "NONET_L03_P014" (solid, pour order 14): 90.1,71.1 ccw(c91.6,71.1) 91.6,69.6 119.6,69.6 ccw(c119.6,70.9) 120.9,70.9 120.9,96.449 ccw(c119.402,96.449) 119.402,97.947 91.647,97.947 ccw(c91.647,96.4) 90.1,96.4

## Silkscreen, mask and mechanical layers (free items; w line width, h text height)
Top Overlay:
  drawing of 249 lines, arcs and shapes, not listed
  text "SWD" at 105.454,89.854 h1.52
  text "USB" at 114.246,84.169 h1.52 r90
  text "GPIO" at 96.754,76.654 h1.52
Mechanical 1:
  the board outline again, w0.254

## Text inside footprints (layer, text, board x,y; h text height)
D1: Mechanical 13 "+" at 106.192,83.008 h0.5
D2: Mechanical 13 "+" at 116.692,71.492 h0.5 r90